# EAGLE board aleph-primary121120 (EAGLE 5.11), part 1 of 2
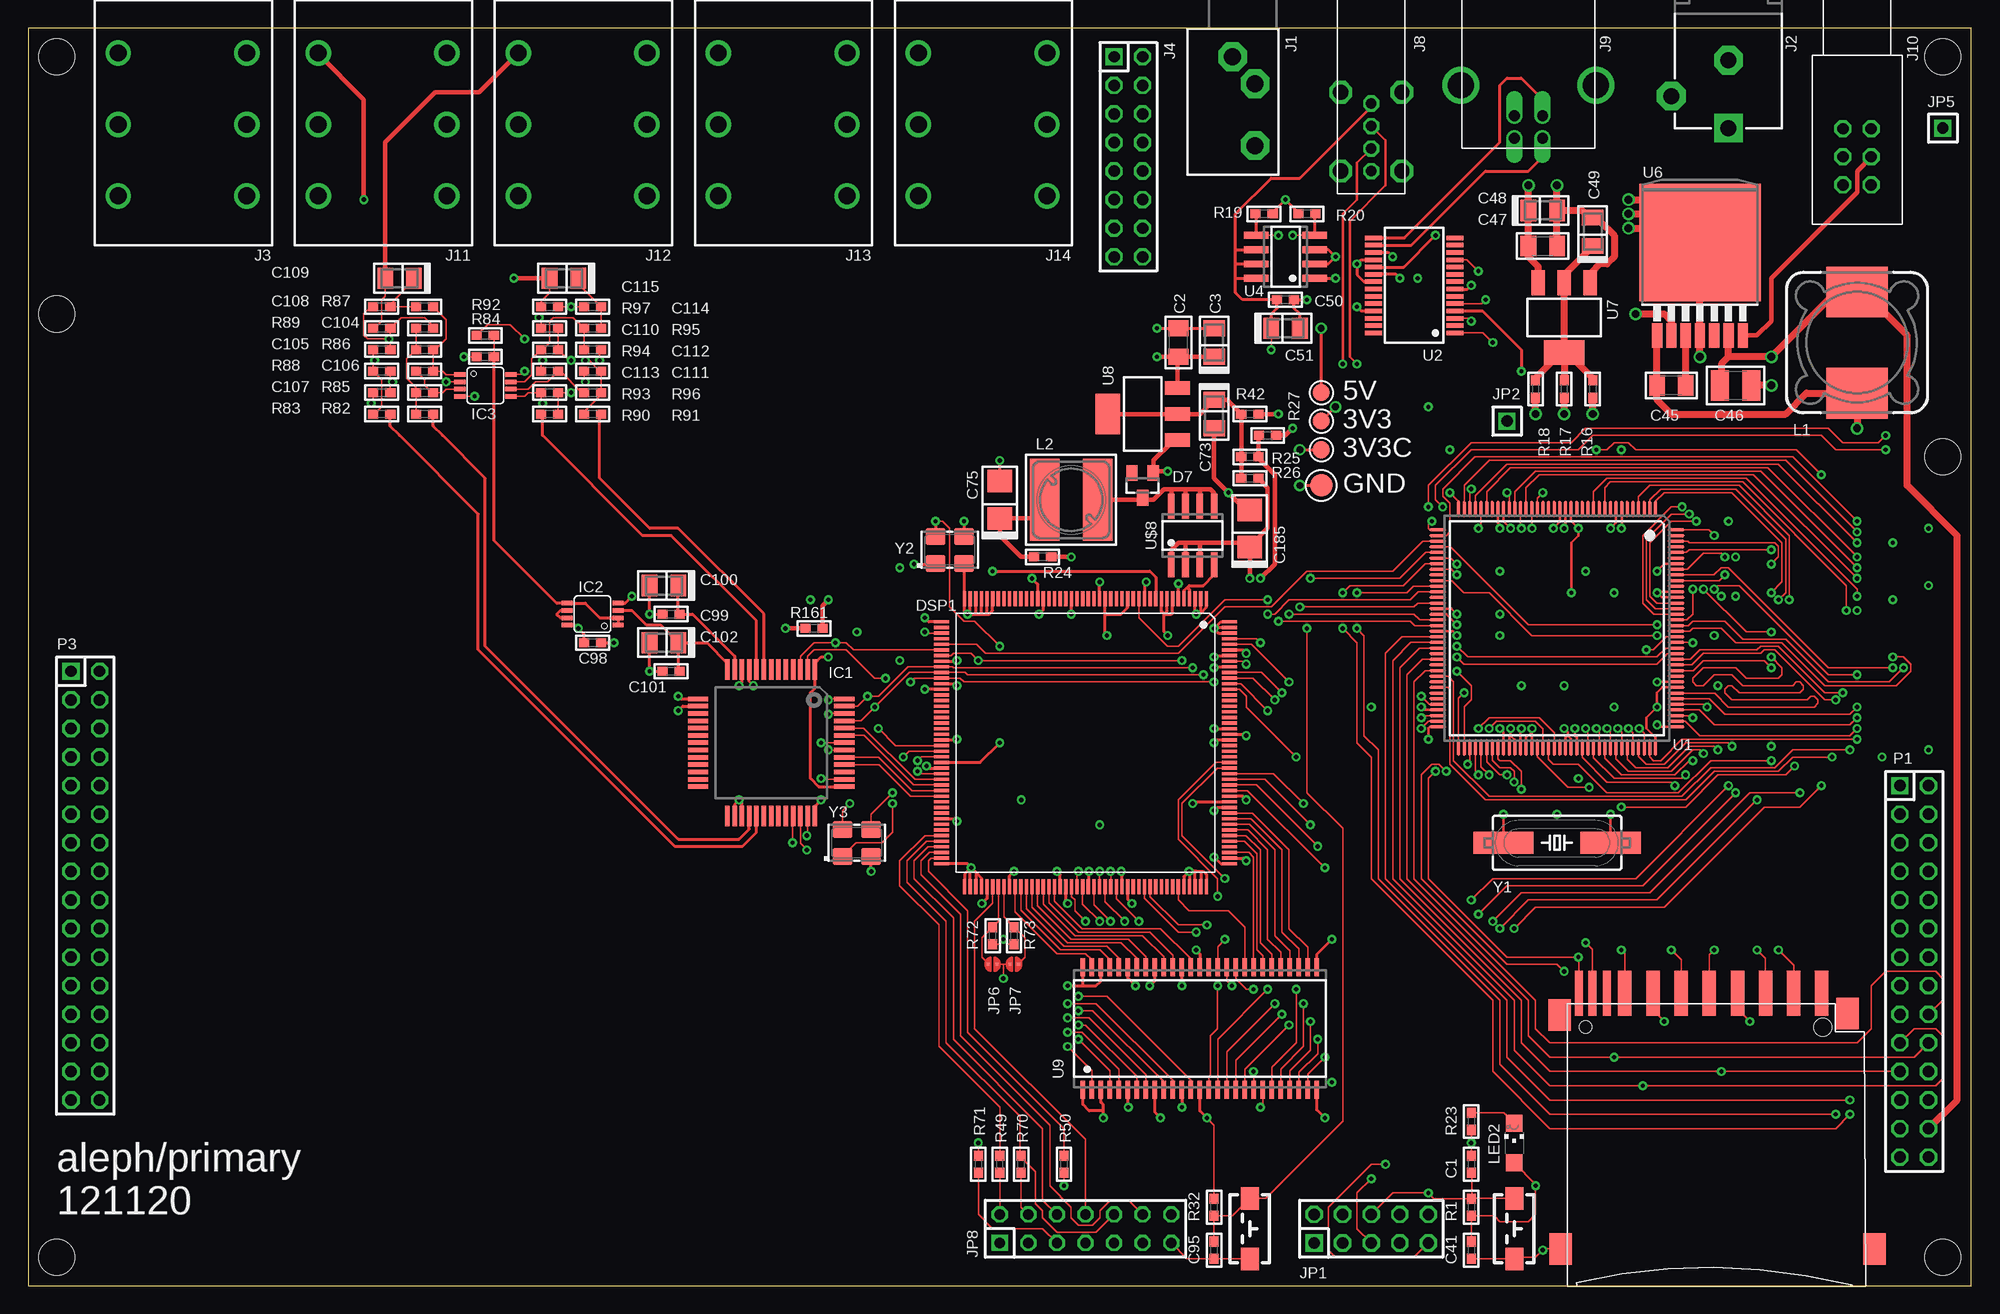
[diagram p0: board, top side]
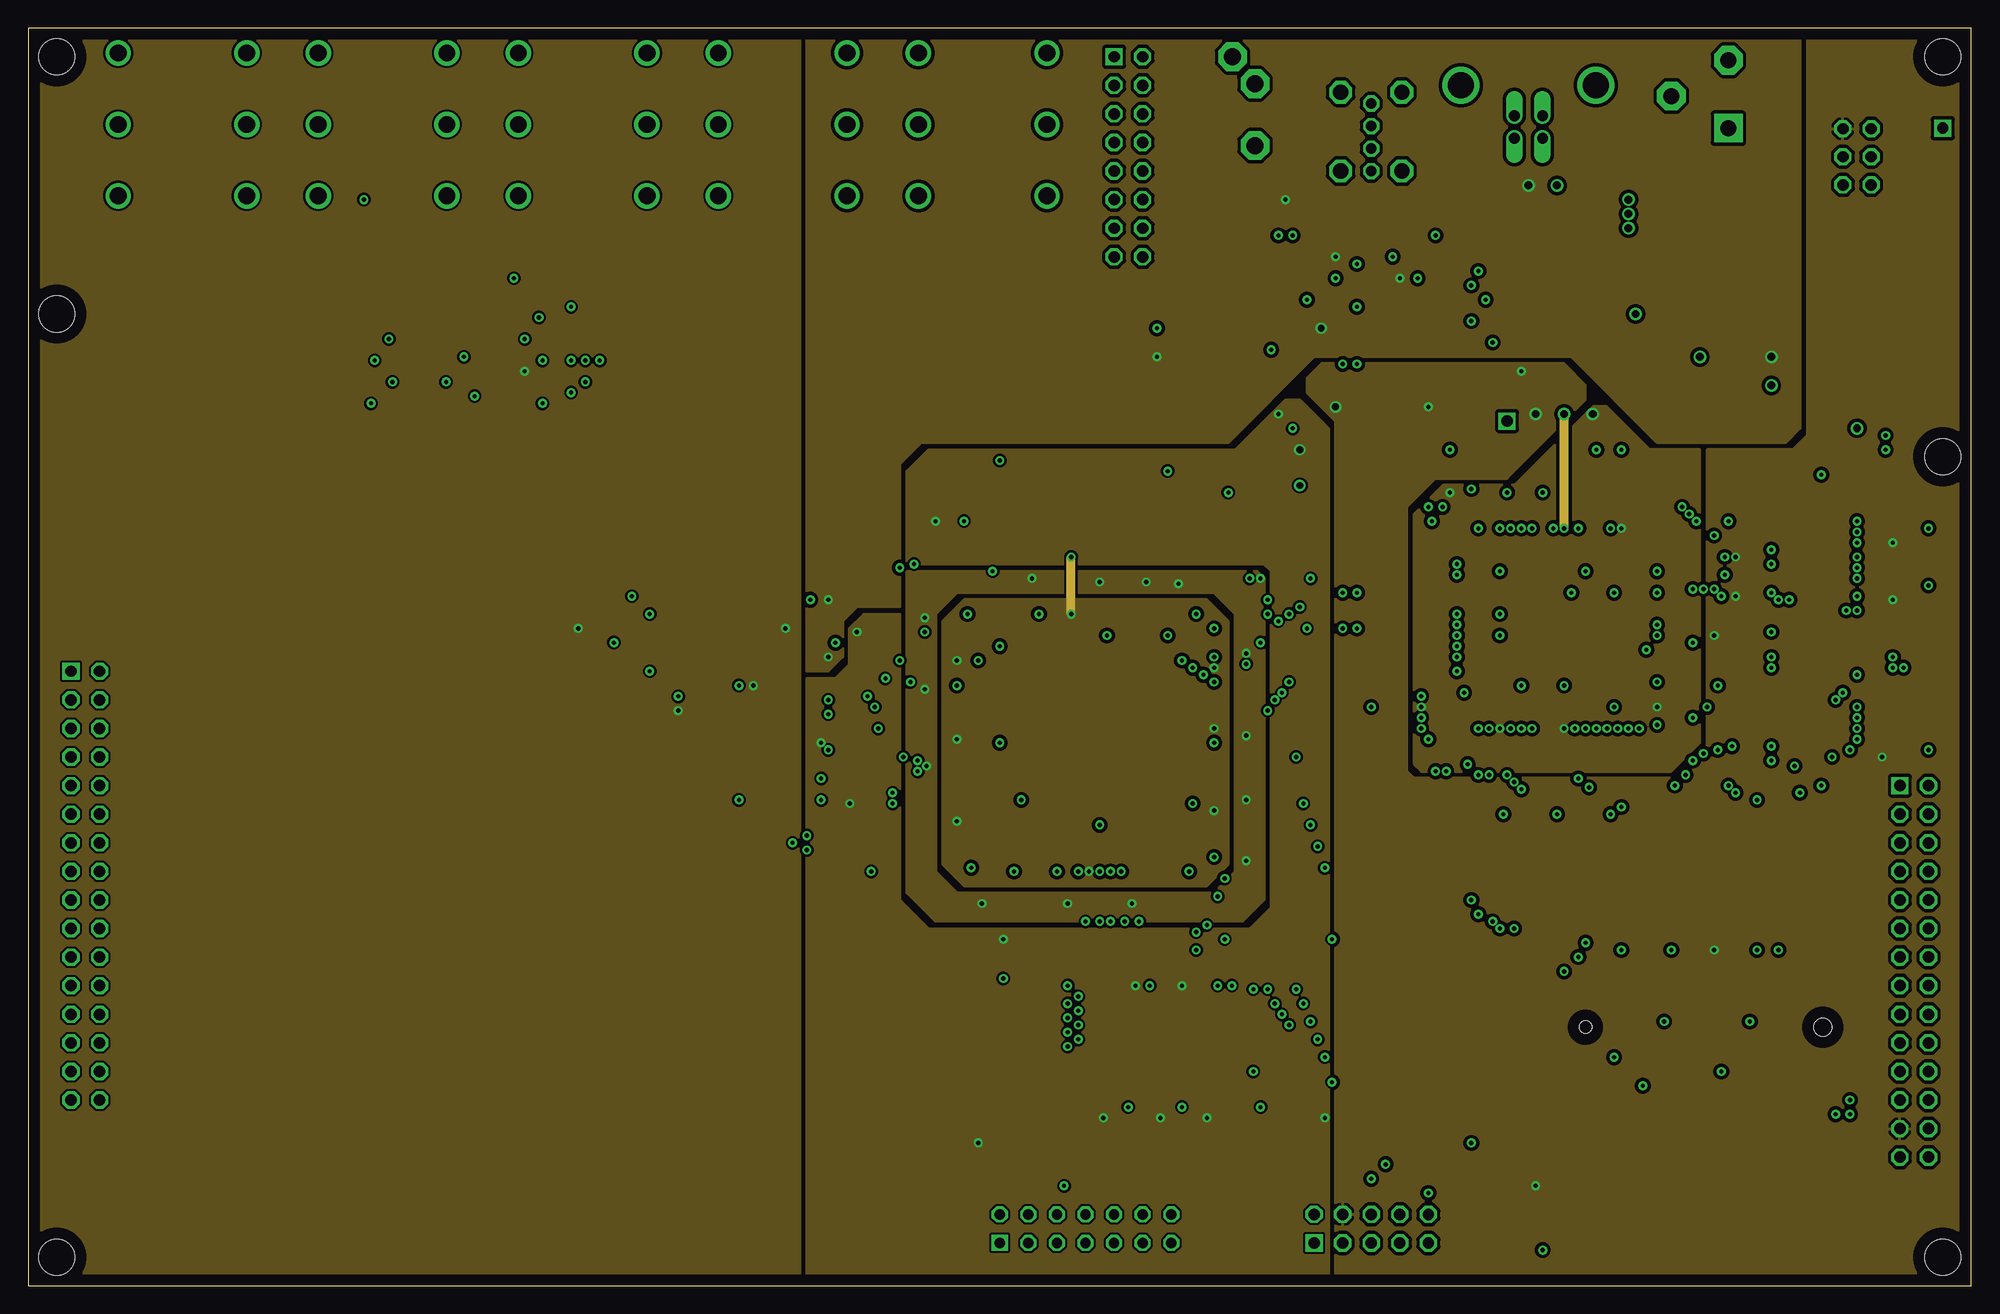
[diagram p1: board, inner layer Route2]
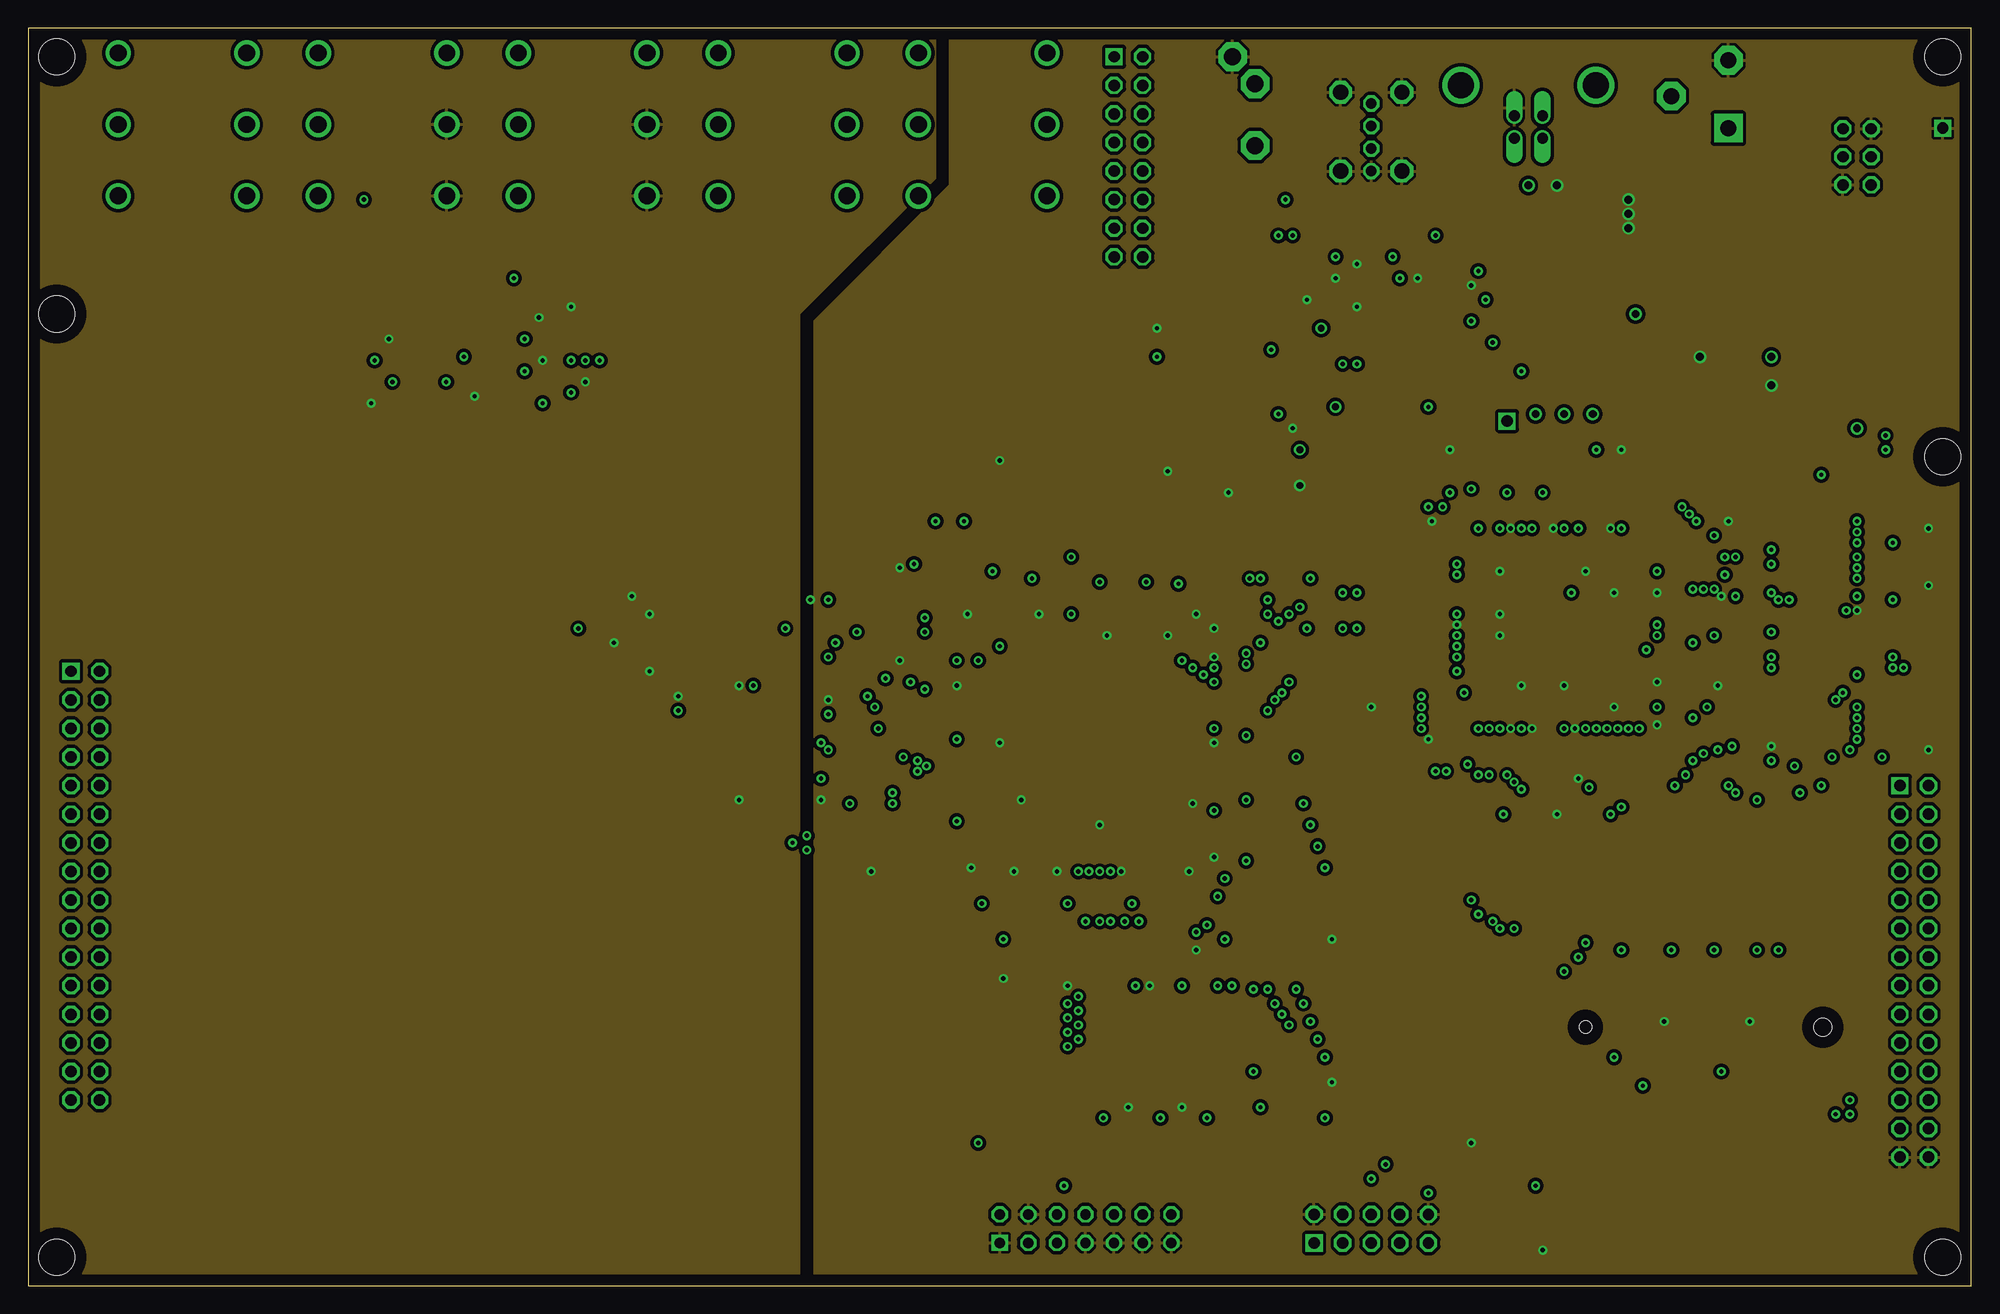
[diagram p2: board, inner layer Route3]
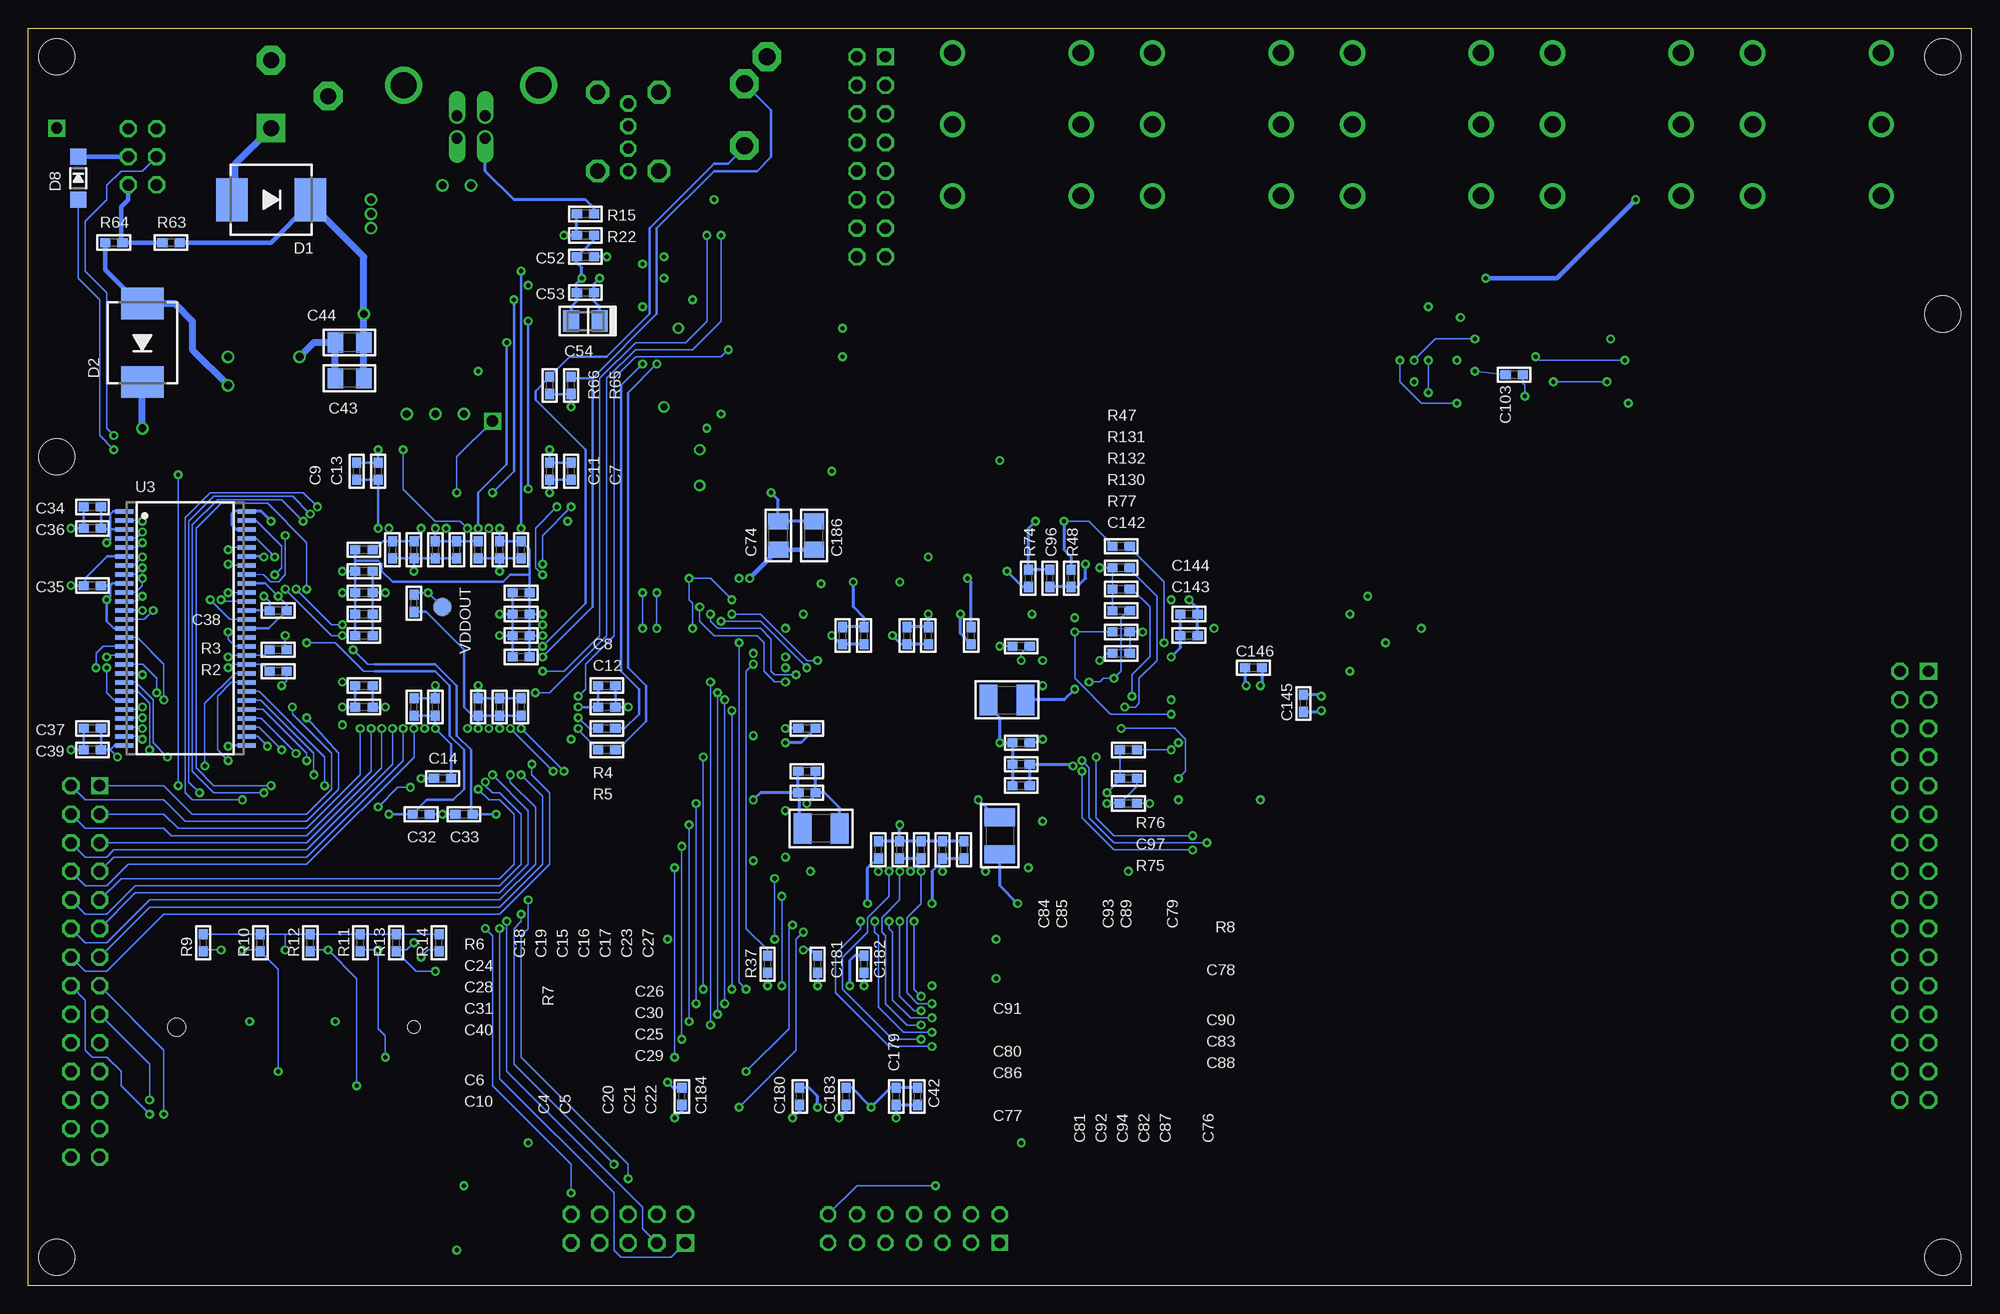
[diagram p3: board, bottom side, seen from below]

Size 172.72 x 111.76 mm. Coordinates in mm from the lower left corner, seen from the top.
Outline: 0,0 172.72,0 172.72,111.76 0,111.76 0,0
Copper layers (1*2+3*16): Top 0.035mm / dielectric 1.5mm / Route2 0.035mm / dielectric 0.15mm / Route3 0.035mm / dielectric 0.2mm / Bottom 0.035mm
Design rules "default *": minimum track width 10mil, minimum drill 24mil, track to track 8mil, track to pad 8mil, pad to pad 8mil, via to via 8mil, smd to smd 8mil, copper to edge 40mil, drill to drill 8mil, minimum pad ring 10mil, minimum via ring 8mil, stop-mask expansion 4mil, vias tented up to drill 0mil, thermal gap 10mil
Holes 3.2 mm at 170.18,109.22 2.54,109.22 2.54,2.54 170.18,2.54 2.54,86.36 170.18,73.66

## Footprints (pad centres in the part's own frame; a part is rotated, then mirrored left to right if it is on the bottom)
SMD-15R = smd 1.5 x 1.5: TP 0,0
C0603 = smd 0.9 x 0.8: 1 -0.762,0; 2 0.762,0
C1206 = smd 1.4 x 1.8: 1 -1.27,0; 2 1.27,0
C1206/T = smd 1.4 x 1.9: + 1.27,0; - -1.27,0
C3225 = smd 1.6 x 2.7: 1 -1.397,0; 2 1.397,0
C3528/T = smd 2 x 2.2: + 1.651,0; - -1.651,0
C1210 = smd 1.6 x 2.7: 1 -1.651,0; 2 1.651,0
SMC = smd 2.8 x 3.8: A 3.493,0; C -3.493,0
SOT23 = smd 1 x 1.4: 1 -0.95,-1.1; 2 0.95,-1.1; 3 0,1.1
SOD123 = smd 1.4 x 1.4: A 1.905,0; C -1.905,0
LQFP176 = smd 1.35 x 0.29: P$1 -12.8,10.75; P$2 -12.8,10.25; P$3 -12.8,9.75; P$4 -12.8,9.25; P$5 -12.8,8.75; P$6 -12.8,8.25; P$7 -12.8,7.75; P$8 -12.8,7.25; P$9 -12.8,6.75; P$10 -12.8,6.25; P$11 -12.8,5.75; P$12 -12.8,5.25; P$13 -12.8,4.75; P$14 -12.8,4.25; P$15 -12.8,3.75; P$16 -12.8,3.25; P$17 -12.8,2.75; P$18 -12.8,2.25; P$19 -12.8,1.75; P$20 -12.8,1.25; P$21 -12.8,0.75; P$22 -12.8,0.25; P$23 -12.8,-0.25; P$24 -12.8,-0.75; P$25 -12.8,-1.25; P$26 -12.8,-1.75; P$27 -12.8,-2.25; P$28 -12.8,-2.75; P$29 -12.8,-3.25; P$30 -12.8,-3.75; P$31 -12.8,-4.25; P$32 -12.8,-4.75; P$33 -12.8,-5.25; P$34 -12.8,-5.75; P$35 -12.8,-6.25; P$36 -12.8,-6.75; P$37 -12.8,-7.25; P$38 -12.8,-7.75; P$39 -12.8,-8.25; P$40 -12.8,-8.75; P$41 -12.8,-9.25; P$42 -12.8,-9.75; P$43 -12.8,-10.25; P$44 -12.8,-10.75; P$89 12.8,-10.75; P$90 12.8,-10.25; P$91 12.8,-9.75; P$92 12.8,-9.25; P$93 12.8,-8.75; P$94 12.8,-8.25; P$95 12.8,-7.75; P$96 12.8,-7.25; P$97 12.8,-6.75; P$98 12.8,-6.25; P$99 12.8,-5.75; P$100 12.8,-5.25; P$101 12.8,-4.75; P$102 12.8,-4.25; P$103 12.8,-3.75; P$104 12.8,-3.25; P$105 12.8,-2.75; P$106 12.8,-2.25; P$107 12.8,-1.75; P$108 12.8,-1.25; P$109 12.8,-0.75; P$110 12.8,-0.25; P$111 12.8,0.25; P$112 12.8,0.75; P$113 12.8,1.25; P$114 12.8,1.75; P$115 12.8,2.25; P$116 12.8,2.75; P$117 12.8,3.25; P$118 12.8,3.75; P$119 12.8,4.25; P$120 12.8,4.75; P$121 12.8,5.25; P$122 12.8,5.75; P$123 12.8,6.25; P$124 12.8,6.75; P$125 12.8,7.25; P$126 12.8,7.75; P$127 12.8,8.25; P$128 12.8,8.75; P$129 12.8,9.25; P$130 12.8,9.75; P$131 12.8,10.25; P$132 12.8,10.75 | smd 0.29 x 1.35: P$45 -10.75,-12.8; P$46 -10.25,-12.8; P$47 -9.75,-12.8; P$48 -9.25,-12.8; P$49 -8.75,-12.8; P$50 -8.25,-12.8; P$51 -7.75,-12.8; P$52 -7.25,-12.8; P$53 -6.75,-12.8; P$54 -6.25,-12.8; P$55 -5.75,-12.8; P$56 -5.25,-12.8; P$57 -4.75,-12.8; P$58 -4.25,-12.8; P$59 -3.75,-12.8; P$60 -3.25,-12.8; P$61 -2.75,-12.8; P$62 -2.25,-12.8; P$63 -1.75,-12.8; P$64 -1.25,-12.8; P$65 -0.75,-12.8; P$66 -0.25,-12.8; P$67 0.25,-12.8; P$68 0.75,-12.8; P$69 1.25,-12.8; P$70 1.75,-12.8; P$71 2.25,-12.8; P$72 2.75,-12.8; P$73 3.25,-12.8; P$74 3.75,-12.8; P$75 4.25,-12.8; P$76 4.75,-12.8; P$77 5.25,-12.8; P$78 5.75,-12.8; P$79 6.25,-12.8; P$80 6.75,-12.8; P$81 7.25,-12.8; P$82 7.75,-12.8; P$83 8.25,-12.8; P$84 8.75,-12.8; P$85 9.25,-12.8; P$86 9.75,-12.8; P$87 10.25,-12.8; P$88 10.75,-12.8; P$133 10.75,12.8; P$134 10.25,12.8; P$135 9.75,12.8; P$136 9.25,12.8; P$137 8.75,12.8; P$138 8.25,12.8; P$139 7.75,12.8; P$140 7.25,12.8; P$141 6.75,12.8; P$142 6.25,12.8; P$143 5.75,12.8; P$144 5.25,12.8; P$145 4.75,12.8; P$146 4.25,12.8; P$147 3.75,12.8; P$148 3.25,12.8; P$149 2.75,12.8; P$150 2.25,12.8; P$151 1.75,12.8; P$152 1.25,12.8; P$153 0.75,12.8; P$154 0.25,12.8; P$155 -0.25,12.8; P$156 -0.75,12.8; P$157 -1.25,12.8; P$158 -1.75,12.8; P$159 -2.25,12.8; P$160 -2.75,12.8; P$161 -3.25,12.8; P$162 -3.75,12.8; P$163 -4.25,12.8; P$164 -4.75,12.8; P$165 -5.25,12.8; P$166 -5.75,12.8; P$167 -6.25,12.8; P$168 -6.75,12.8; P$169 -7.25,12.8; P$170 -7.75,12.8; P$171 -8.25,12.8; P$172 -8.75,12.8; P$173 -9.25,12.8; P$174 -9.75,12.8; P$175 -10.25,12.8; P$176 -10.75,12.8
SMD-20R = smd 2 x 2: TP 0,0
PQFP52 = smd 1.8 x 0.4: 1 -6.5,3.9; 2 -6.5,3.25; 3 -6.5,2.6; 4 -6.5,1.95; 5 -6.5,1.3; 6 -6.5,0.65; 7 -6.5,0; 8 -6.5,-0.65; 9 -6.5,-1.3; 10 -6.5,-1.95; 11 -6.5,-2.6; 12 -6.5,-3.25; 13 -6.5,-3.9; 27 6.5,-3.9; 28 6.5,-3.25; 29 6.5,-2.6; 30 6.5,-1.95; 31 6.5,-1.3; 32 6.5,-0.65; 33 6.5,0; 34 6.5,0.65; 35 6.5,1.3; 36 6.5,1.95; 37 6.5,2.6; 38 6.5,3.25; 39 6.5,3.9 | smd 0.4 x 1.8: 14 -3.9,-6.5; 15 -3.25,-6.5; 16 -2.6,-6.5; 17 -1.95,-6.5; 18 -1.3,-6.5; 19 -0.65,-6.5; 20 0,-6.5; 21 0.65,-6.5; 22 1.3,-6.5; 23 1.95,-6.5; 24 2.6,-6.5; 25 3.25,-6.5; 26 3.9,-6.5; 40 3.9,6.5; 41 3.25,6.5; 42 2.6,6.5; 43 1.95,6.5; 44 1.3,6.5; 45 0.65,6.5; 46 0,6.5; 47 -0.65,6.5; 48 -1.3,6.5; 49 -1.95,6.5; 50 -2.6,6.5; 51 -3.25,6.5; 52 -3.9,6.5
MSOP08 = smd 0.4 x 1: 1 -0.976,-2.263; 2 -0.326,-2.263; 3 0.324,-2.263; 4 0.974,-2.263; 5 0.974,2.262; 6 0.324,2.262; 7 -0.326,2.262; 8 -0.976,2.262
SJ1-3533NG = drill 1.5 pad 2.54 octagon: 1 0,-0.9; 2 2.4,1.1; 3 7.9,1.1
PJ-102XH = drill 1.422 pad 2.54 square: 1 0,0 | drill 1.422 pad 2.54 octagon: 2 0,-6.032; 3 5.08,-2.857
NEUTRIK-NRJ6HM-1 = drill 1.5 round: R 7.23,11.1; RN -4.2,11.1; S 7.23,4.75; SN -4.2,4.75; T 7.23,17.45; TN -4.2,17.45
DIL-100-2X08 = drill 1.016 square: 1 -8.89,-1.27 | drill 1.016 octagon: 2 -8.89,1.27; 3 -6.35,-1.27; 4 -6.35,1.27; 5 -3.81,-1.27; 6 -3.81,1.27; 7 -1.27,-1.27; 8 -1.27,1.27; 9 1.27,-1.27; 10 1.27,1.27; 11 3.81,-1.27; 12 3.81,1.27; 13 6.35,-1.27; 14 6.35,1.27; 15 8.89,-1.27; 16 8.89,1.27
USBA-VERT = drill 0.92 octagon: 1 0,-6; 2 0,-4; 3 0,-2; 4 0,0 | drill 1.35 octagon: G1 -2.72,0; G2 -2.72,-7; G3 2.72,-7; G4 2.72,0
USB_B = drill 0.95 offset: DM -1.25,4.71; DP -1.25,2.71; GND 1.25,2.71; VCC 1.25,4.71 | drill 2.3 round: MOUNT1 -6,0; MOUNT2 6,0
PHA2U = drill 1 octagon: 0 -1.25,0; 1 -1.25,-2.5; 2 -1.25,2.5; _0 1.25,0; _1 1.25,-2.5; _2 1.25,2.5
AVR-JTAG-10 = drill 1.016 square: 1 -5.08,-1.27 | drill 1.016 octagon: 2 -5.08,1.27; 3 -2.54,-1.27; 4 -2.54,1.27; 5 0,-1.27; 6 0,1.27; 7 2.54,-1.27; 8 2.54,1.27; 9 5.08,-1.27; 10 5.08,1.27
1X01 = drill 1.016 square: 1 0,0
SJ-35 = smd 0.254 x 0.254: 1 -0.381,0; 2 0.381,0
JPQ-07 = drill 0.914 square: 1 -7.62,-1.27 | drill 0.914 octagon: 2 -7.62,1.27; 3 -5.08,-1.27; 4 -5.08,1.27; 5 -2.54,-1.27; 6 -2.54,1.27; 7 0,-1.27; 8 0,1.27; 9 2.54,-1.27; 10 2.54,1.27; 11 5.08,-1.27; 12 5.08,1.27; 13 7.62,-1.27; 14 7.62,1.27
MSS1278 = smd 5.5 x 4.5: 1 0,4.5; 2 0,-4.5
SRR6038 = smd 7.3 x 2.6: 1 0,2.35; 2 0,-2.35
CHIPLED_1206 = smd 1.5 x 1.5: A 0,-1.75; C 0,1.75
DIL-100-2X14 = drill 1.016 square: 1 -16.51,-1.27 | drill 1.016 octagon: 2 -16.51,1.27; 3 -13.97,-1.27; 4 -13.97,1.27; 5 -11.43,-1.27; 6 -11.43,1.27; 7 -8.89,-1.27; 8 -8.89,1.27; 9 -6.35,-1.27; 10 -6.35,1.27; 11 -3.81,-1.27; 12 -3.81,1.27; 13 -1.27,-1.27; 14 -1.27,1.27; 15 1.27,-1.27; 16 1.27,1.27; 17 3.81,-1.27; 18 3.81,1.27; 19 6.35,-1.27; 20 6.35,1.27; 21 8.89,-1.27; 22 8.89,1.27; 23 11.43,-1.27; 24 11.43,1.27; 25 13.97,-1.27; 26 13.97,1.27; 27 16.51,-1.27; 28 16.51,1.27
DIL-100-2X16 = drill 1.016 square: 1 -19.05,-1.27 | drill 1.016 octagon: 2 -19.05,1.27; 3 -16.51,-1.27; 4 -16.51,1.27; 5 -13.97,-1.27; 6 -13.97,1.27; 7 -11.43,-1.27; 8 -11.43,1.27; 9 -8.89,-1.27; 10 -8.89,1.27; 11 -6.35,-1.27; 12 -6.35,1.27; 13 -3.81,-1.27; 14 -3.81,1.27; 15 -1.27,-1.27; 16 -1.27,1.27; 17 1.27,-1.27; 18 1.27,1.27; 19 3.81,-1.27; 20 3.81,1.27; 21 6.35,-1.27; 22 6.35,1.27; 23 8.89,-1.27; 24 8.89,1.27; 25 11.43,-1.27; 26 11.43,1.27; 27 13.97,-1.27; 28 13.97,1.27; 29 16.51,-1.27; 30 16.51,1.27; 31 19.05,-1.27; 32 19.05,1.27
R0603 = smd 0.9 x 0.8: 1 -0.762,0; 2 0.762,0
LQFP144 = smd 0.25 x 1.5: 1 -8.75,-10.6; 2 -8.25,-10.6; 3 -7.75,-10.6; 4 -7.25,-10.6; 5 -6.75,-10.6; 6 -6.25,-10.6; 7 -5.75,-10.6; 8 -5.25,-10.6; 9 -4.75,-10.6; 10 -4.25,-10.6; 11 -3.75,-10.6; 12 -3.25,-10.6; 13 -2.75,-10.6; 14 -2.25,-10.6; 15 -1.75,-10.6; 16 -1.25,-10.6; 17 -0.75,-10.6; 18 -0.25,-10.6; 19 0.25,-10.6; 20 0.75,-10.6; 21 1.25,-10.6; 22 1.75,-10.6; 23 2.25,-10.6; 24 2.75,-10.6; 25 3.25,-10.6; 26 3.75,-10.6; 27 4.25,-10.6; 28 4.75,-10.6; 29 5.25,-10.6; 30 5.75,-10.6; 31 6.25,-10.6; 32 6.75,-10.6; 33 7.25,-10.6; 34 7.75,-10.6; 35 8.25,-10.6; 36 8.75,-10.6; 73 8.75,10.6; 74 8.25,10.6; 75 7.75,10.6; 76 7.25,10.6; 77 6.75,10.6; 78 6.25,10.6; 79 5.75,10.6; 80 5.25,10.6; 81 4.75,10.6; 82 4.25,10.6; 83 3.75,10.6; 84 3.25,10.6; 85 2.75,10.6; 86 2.25,10.6; 87 1.75,10.6; 88 1.25,10.6; 89 0.75,10.6; 90 0.25,10.6; 91 -0.25,10.6; 92 -0.75,10.6; 93 -1.25,10.6; 94 -1.75,10.6; 95 -2.25,10.6; 96 -2.75,10.6; 97 -3.25,10.6; 98 -3.75,10.6; 99 -4.25,10.6; 100 -4.75,10.6; 101 -5.25,10.6; 102 -5.75,10.6; 103 -6.25,10.6; 104 -6.75,10.6; 105 -7.25,10.6; 106 -7.75,10.6; 107 -8.25,10.6; 108 -8.75,10.6 | smd 1.5 x 0.25: 37 10.6,-8.75; 38 10.6,-8.25; 39 10.6,-7.75; 40 10.6,-7.25; 41 10.6,-6.75; 42 10.6,-6.25; 43 10.6,-5.75; 44 10.6,-5.25; 45 10.6,-4.75; 46 10.6,-4.25; 47 10.6,-3.75; 48 10.6,-3.25; 49 10.6,-2.75; 50 10.6,-2.25; 51 10.6,-1.75; 52 10.6,-1.25; 53 10.6,-0.75; 54 10.6,-0.25; 55 10.6,0.25; 56 10.6,0.75; 57 10.6,1.25; 58 10.6,1.75; 59 10.6,2.25; 60 10.6,2.75; 61 10.6,3.25; 62 10.6,3.75; 63 10.6,4.25; 64 10.6,4.75; 65 10.6,5.25; 66 10.6,5.75; 67 10.6,6.25; 68 10.6,6.75; 69 10.6,7.25; 70 10.6,7.75; 71 10.6,8.25; 72 10.6,8.75; 109 -10.6,8.75; 110 -10.6,8.25; 111 -10.6,7.75; 112 -10.6,7.25; 113 -10.6,6.75; 114 -10.6,6.25; 115 -10.6,5.75; 116 -10.6,5.25; 117 -10.6,4.75; 118 -10.6,4.25; 119 -10.6,3.75; 120 -10.6,3.25; 121 -10.6,2.75; 122 -10.6,2.25; 123 -10.6,1.75; 124 -10.6,1.25; 125 -10.6,0.75; 126 -10.6,0.25; 127 -10.6,-0.25; 128 -10.6,-0.75; 129 -10.6,-1.25; 130 -10.6,-1.75; 131 -10.6,-2.25; 132 -10.6,-2.75; 133 -10.6,-3.25; 134 -10.6,-3.75; 135 -10.6,-4.25; 136 -10.6,-4.75; 137 -10.6,-5.25; 138 -10.6,-5.75; 139 -10.6,-6.25; 140 -10.6,-6.75; 141 -10.6,-7.25; 142 -10.6,-7.75; 143 -10.6,-8.25; 144 -10.6,-8.75
SSOP28 = smd 0.4 x 1.5: 1 -4.225,-3.625; 2 -3.575,-3.625; 3 -2.925,-3.625; 4 -2.275,-3.625; 5 -1.625,-3.625; 6 -0.975,-3.625; 7 -0.325,-3.625; 8 0.325,-3.625; 9 0.975,-3.625; 10 1.625,-3.625; 11 2.275,-3.625; 12 2.925,-3.625; 13 3.575,-3.625; 14 4.225,-3.625; 15 4.225,3.625; 16 3.575,3.625; 17 2.925,3.625; 18 2.275,3.625; 19 1.625,3.625; 20 0.975,3.625; 21 0.325,3.625; 22 -0.325,3.625; 23 -0.975,3.625; 24 -1.625,3.625; 25 -2.275,3.625; 26 -2.925,3.625; 27 -3.575,3.625; 28 -4.225,3.625
TSOP54 = smd 0.4 x 1.6: 1 -10.4,-5.45; 2 -9.6,-5.45; 3 -8.8,-5.45; 4 -8,-5.45; 5 -7.2,-5.45; 6 -6.4,-5.45; 7 -5.6,-5.45; 8 -4.8,-5.45; 9 -4,-5.45; 10 -3.2,-5.45; 11 -2.4,-5.45; 12 -1.6,-5.45; 13 -0.8,-5.45; 14 0,-5.45; 15 0.8,-5.45; 16 1.6,-5.45; 17 2.4,-5.45; 18 3.2,-5.45; 19 4,-5.45; 20 4.8,-5.45; 21 5.6,-5.45; 22 6.4,-5.45; 23 7.2,-5.45; 24 8,-5.45; 25 8.8,-5.45; 26 9.6,-5.45; 27 10.4,-5.45; 28 10.4,5.45; 29 9.6,5.45; 30 8.8,5.45; 31 8,5.45; 32 7.2,5.45; 33 6.4,5.45; 34 5.6,5.45; 35 4.8,5.45; 36 4,5.45; 37 3.2,5.45; 38 2.4,5.45; 39 1.6,5.45; 40 0.8,5.45; 41 0,5.45; 42 -0.8,5.45; 43 -1.6,5.45; 44 -2.4,5.45; 45 -3.2,5.45; 46 -4,5.45; 47 -4.8,5.45; 48 -5.6,5.45; 49 -6.4,5.45; 50 -7.2,5.45; 51 -8,5.45; 52 -8.8,5.45; 53 -9.6,5.45; 54 -10.4,5.45
SO08 = smd 0.6 x 2.2: 1 -1.905,-2.6; 2 -0.635,-2.6; 3 0.635,-2.6; 4 1.905,-2.6; 5 1.905,2.6; 6 0.635,2.6; 7 -0.635,2.6; 8 -1.905,2.6
TO263-7 = smd 0.914 x 2.159: 1 -3.81,-5.715; 2 -2.54,-5.715; 3 -1.27,-5.715; 4 0,-5.715; 5 1.27,-5.715; 6 2.54,-5.715; 7 3.81,-5.715 | smd 10.8 x 10.41: 8 0,2.54
SOT223 = smd 1.219 x 2.235: 1 -2.311,-3.099; 2 0,-3.099; 3 2.311,-3.099 | smd 3.6 x 2.2: 4 0,3.099
PANASONIC-EVQ = smd 2 x 1.6: 1 2.7,0; 2 -2.7,0
06132 = smd 1.2 x 4: 1 6.9,0.9; 2 4.4,0.9; 3 1.9,0.9; 4 -0.6,0.9; 5 -3.1,0.9; 6 -5.6,0.9; 7 -8.1,0.9; 9 9.4,0.9 | smd 0.7 x 4: 8 -9.7,0.9; CD -11,0.9; WP -12.2,0.9 | smd 2 x 2.8: GP -13.8,-21.8; GP2 14.1,-21.8; GP3 11.7,-0.9; GP4 -13.9,-1 | hole 1.1: -11.6,-2.1 | hole 1.6: 9.5,-2.1
SMD-15RN = smd 1.5 x 1.5: TP 0,0
HC49UP = smd 5.334 x 1.93: 1 -4.763,0; 2 4.763,0
ASFL1 = smd 1.7 x 1.5: 1 -1.27,-1.2; 2 1.27,-1.2; 3 1.27,1.2; 4 -1.27,1.2

## Placement (x,y rotation side)
3V3  TPS-SMD-15R  [SMD-15R]  114.94,76.83 0 top
3V3C  TPS-SMD-15R  [SMD-15R]  114.94,74.3 0 top
5V  TPS-SMD-15R  [SMD-15R]  114.94,79.38 0 top
C1  100n  [C0603]  128.27,10.79 90 top
C2  100n  [C1206]  102.23,83.82 270 top
C3  10u  [C1206/T]  105.41,83.82 270 top
C4  100n  [C0603]  138.43,51.44 90 bottom
C5  33n  [C0603]  136.53,51.44 90 bottom
C6  100n  [C0603]  142.88,53.34 0 bottom
C7  100n  [C0603]  124.46,72.39 90 bottom
C8  100n  [C0603]  121.28,53.34 0 bottom
C9  100n  [C0603]  143.51,72.39 90 bottom
C10  33n  [C0603]  142.88,51.44 0 bottom
C11  33n  [C0603]  126.36,72.39 90 bottom
C12  33n  [C0603]  121.28,51.44 0 bottom
C13  33n  [C0603]  141.6,72.39 90 bottom
C14  4.7u  [C0603]  135.89,45.09 180 bottom
C15  33n  [C0603]  136.53,65.41 270 bottom
C16  100n  [C0603]  134.62,65.41 270 bottom
C17  4.7u  [C0603]  132.72,65.41 270 bottom
C18  2.2u  [C0603]  140.34,65.41 270 bottom
C19  470p  [C0603]  138.43,65.41 270 bottom
C20  2.7n  [C0603]  132.72,51.44 90 bottom
C21  33n  [C0603]  130.81,51.44 90 bottom
C22  2.2u  [C0603]  128.91,51.44 90 bottom
C23  2.7n  [C0603]  130.81,65.41 270 bottom
C24  2.7n  [C0603]  142.88,63.5 0 bottom
C25  2.7n  [C0603]  128.91,57.78 180 bottom
C26  2.7n  [C0603]  128.91,61.59 180 bottom
C27  33n  [C0603]  128.91,65.41 270 bottom
C28  33n  [C0603]  142.88,61.59 0 bottom
C29  33n  [C0603]  128.91,55.88 180 bottom
C30  33n  [C0603]  128.91,59.69 180 bottom
C31  100n  [C0603]  142.88,59.69 0 bottom
C32  22p  [C0603]  137.79,41.91 0 bottom
C33  22p  [C0603]  133.99,41.91 180 bottom
C34  4.7u  [C0603]  167,69.22 180 bottom
C35  100n  [C0603]  167,62.23 180 bottom
C36  33n  [C0603]  167,67.31 180 bottom
C37  100n  [C0603]  167,49.53 180 bottom
C38  33n  [C0603]  150.5,60.01 0 bottom
C39  4.7u  [C0603]  167,47.62 180 bottom
C40  2.2u  [C0603]  142.88,57.78 0 bottom
C41  100n  [C0603]  128.27,3.17 270 top
C42  10n  [C0603]  93.66,16.83 270 bottom
C43  22u  [C1206]  144.15,80.64 0 bottom
C44  470n  [C1206]  144.15,83.82 0 bottom
C45  10n  [C1206]  146.05,80.01 0 top
C46  47u  [C3225]  151.76,80.01 0 top
C47  100n  [C1206]  134.62,92.39 180 top
C48  10u  [C1206/T]  134.62,95.57 180 top
C49  10u  [C1206/T]  139.06,93.66 270 top
C50  100n  [C0603]  111.76,87.63 180 top
C51  4.7u  [C1206/T]  111.76,85.09 180 top
C52  100n  [C0603]  123.19,91.44 0 bottom
C53  100n  [C0603]  123.19,88.27 0 bottom
C54  4.7u  [C1206/T]  123.19,85.72 0 bottom
C73  10u  [C1206/T]  105.41,77.47 90 top
C74  100n  [C1206]  106.05,66.67 270 bottom
C75  100u  [C3528/T]  86.36,69.85 270 top
C76  10u  [C1210]  86.36,40.01 270 bottom
C77  10u  [C1210]  102.23,40.64 180 bottom
C78  10u  [C1210]  85.72,52.07 0 bottom
C79  100n  [C0603]  88.9,57.78 90 bottom
C80  100n  [C0603]  103.5,45.72 180 bottom
C81  100n  [C0603]  97.16,38.73 270 bottom
C82  100n  [C0603]  91.44,38.73 270 bottom
C83  100n  [C0603]  84.45,46.35 0 bottom
C84  100n  [C0603]  100.33,57.78 90 bottom
C85  10n  [C0603]  98.42,57.78 90 bottom
C86  10n  [C0603]  103.5,43.81 180 bottom
C87  10n  [C0603]  89.53,38.73 270 bottom
C88  10n  [C0603]  84.45,44.45 0 bottom
C89  100n  [C0603]  92.71,57.78 90 bottom
C90  100n  [C0603]  84.45,48.26 0 bottom
C91  100n  [C0603]  103.5,49.53 180 bottom
C92  100n  [C0603]  95.25,38.73 270 bottom
C93  10n  [C0603]  94.61,57.78 90 bottom
C94  10n  [C0603]  93.34,38.73 270 bottom
C95  100n  [C0603]  105.41,3.17 270 top
C96  100n  [C0603]  81.92,62.87 90 bottom
C97  100n  [C0603]  74.93,45.09 180 bottom
C98  100n  [C0603]  50.16,57.15 0 top
C99  100n  [C0603]  57.15,59.69 0 top
C100  10u  [C1206/T]  56.52,62.23 0 top
C101  100n  [C0603]  57.15,54.61 0 top
C102  10u  [C1206/T]  56.52,57.15 0 top
C103  100n  [C0603]  40.64,80.96 180 bottom
C104  330p  [C0603]  35.24,85.09 180 top
C105  330p  [C0603]  31.43,83.19 0 top
C106  100p  [C0603]  35.24,81.28 0 top
C107  220p  [C0603]  31.43,79.38 0 top
C108  2200p  [C0603]  31.43,87 0 top
C109  10u  [C1206/T]  33.02,89.53 0 top
C110  330p  [C0603]  46.35,85.09 0 top
C111  330p  [C0603]  50.16,81.28 180 top
C112  100p  [C0603]  50.16,83.19 180 top
C113  220p  [C0603]  46.35,81.28 0 top
C114  2200p  [C0603]  50.16,87 0 top
C115  10u  [C1206/T]  47.62,89.53 0 top
C142  10n  [C0603]  75.56,56.2 180 bottom
C143  100n  [C0603]  69.53,57.78 0 bottom
C144  100n  [C0603]  69.53,59.69 0 bottom
C145  100n  [C0603]  59.37,51.75 90 bottom
C146  100n  [C0603]  63.82,54.93 0 bottom
C179  10n  [C0603]  95.57,16.83 270 bottom
C180  10n  [C0603]  104.14,16.83 270 bottom
C181  10n  [C0603]  102.55,28.57 270 bottom
C182  10n  [C0603]  98.42,28.57 270 bottom
C183  10n  [C0603]  100.01,16.83 270 bottom
C184  10n  [C0603]  114.62,16.83 270 bottom
C185  100u  [C3528/T]  108.58,67.31 270 top
C186  10u  [C1206]  102.87,66.67 270 bottom
D1  MBRS360T3  [SMC]  151.13,96.52 180 bottom
D2  MBRS360T3  [SMC]  162.56,83.82 90 bottom
D7  zhcs1000  [SOT23]  99.06,71.12 180 top
D8  1N4148W-7  [SOD123]  168.28,98.42 270 bottom
DSP1  BF533  [LQFP176]  93.98,48.26 270 top
GND  TPS-SMD-20R  [SMD-20R]  114.94,71.12 0 top
IC1  AD1836  [PQFP52]  66.04,48.26 270 top
IC2  AD8606  [MSOP08]  50.16,59.69 90 top
IC3  AD8606  [MSOP08]  40.64,80.01 270 top
J1  SJ1-3533NG  [SJ1-3533NG]  107.95,109.22 270 top
J2  PJ-102AH/BH  [PJ-102XH]  151.13,102.87 180 top
J3  STEREOSW2GND  [NEUTRIK-NRJ6HM-1]  15.24,114.3 180 top
J4  F-2X08-DIL-100  [DIL-100-2X08]  97.79,100.33 270 top
J8  USBA-VERT  [USBA-VERT]  119.38,99.06 180 top
J9  [USB_B]  133.35,106.68 180 top
J10  PHA2U  [PHA2U]  162.56,100.33 180 top
J11  STEREOSW2GND  [NEUTRIK-NRJ6HM-1]  33.02,114.3 180 top
J12  STEREOSW2GND  [NEUTRIK-NRJ6HM-1]  50.8,114.3 180 top
J13  STEREOSW2GND  [NEUTRIK-NRJ6HM-1]  68.58,114.3 180 top
J14  STEREOSW2GND  [NEUTRIK-NRJ6HM-1]  86.36,114.3 180 top
JP1  AVR-JTAG  [AVR-JTAG-10]  119.38,5.08 0 top
JP2  [1X01]  131.44,76.83 0 top
JP5  [1X01]  170.18,102.87 0 top
JP6  [SJ-35]  85.72,28.57 180 top
JP7  [SJ-35]  87.63,28.57 0 top
JP8  JPQ-07-100  [JPQ-07]  93.98,5.08 0 top
L1  MSS1278  [MSS1278]  162.56,83.82 180 top
L2  SRR6038-100Y  [SRR6038]  92.71,69.85 270 top
LED2  [CHIPLED_1206]  132.08,12.7 0 top
P1  M-2X14-DIL-100  [DIL-100-2X14]  167.64,27.94 270 top
P3  M-2X16-DIL-100  [DIL-100-2X16]  5.08,35.56 270 top
R1  10k  [R0603]  128.27,6.99 270 top
R2  4.7k  [R0603]  150.5,54.61 0 bottom
R3  4.7k  [R0603]  150.5,56.52 0 bottom
R4  39  [R0603]  121.28,49.53 0 bottom
R5  39  [R0603]  121.28,47.62 0 bottom
R6  0  [R0603]  142.88,65.41 180 bottom
R7  0  [R0603]  138.43,60.64 270 bottom
R8  100k  [R0603]  84.45,56.83 180 bottom
R9  100k  [R0603]  157.16,30.48 90 bottom
R10  100k  [R0603]  152.08,30.48 90 bottom
R11  100k  [R0603]  143.19,30.48 90 bottom
R12  100k  [R0603]  147.64,30.48 90 bottom
R13  100k  [R0603]  140.02,30.48 90 bottom
R14  100k  [R0603]  136.21,30.48 90 bottom
R15  4.7k  [R0603]  123.19,95.25 0 bottom
R16  0  [R0603]  139.06,79.69 90 top
R17  0  [R0603]  136.53,79.69 90 top
R18  0  [R0603]  133.99,79.69 90 top
R19  47k  [R0603]  109.86,95.25 0 top
R20  47k  [R0603]  113.67,95.25 180 top
R22  10k  [R0603]  123.19,93.34 0 bottom
R23  150  [R0603]  128.27,14.61 90 top
R24  0  [R0603]  90.17,64.77 180 top
R25  0  [R0603]  108.58,73.66 180 top
R26  0  [R0603]  108.58,71.75 180 top
R27  3.32k  [R0603]  110.17,75.56 0 top
R32  10k  [R0603]  105.41,6.99 90 top
R37  22  [R0603]  107,28.57 90 bottom
R42  0  [R0603]  108.58,77.47 180 top
R47  4k7  [R0603]  75.56,65.72 0 bottom
R48  10k  [R0603]  80.01,62.87 90 bottom
R49  0  [R0603]  86.36,10.79 270 top
R50  0  [R0603]  92.08,10.79 270 top
R63  330k  [R0603]  160.02,92.71 0 bottom
R64  100k  [R0603]  165.1,92.71 180 bottom
R65  10k  [R0603]  124.46,80.01 90 bottom
R66  10k  [R0603]  126.36,80.01 90 bottom
R70  4k7  [R0603]  88.27,10.79 270 top
R71  4k7  [R0603]  84.45,10.79 270 top
R72  10k  [R0603]  85.72,31.11 270 top
R73  10k  [R0603]  87.63,31.11 270 top
R74  33  [R0603]  83.82,62.87 90 bottom
R75  10k  [R0603]  74.93,42.86 0 bottom
R76  33  [R0603]  74.93,47.62 180 bottom
R77  10k  [R0603]  75.56,58.1 0 bottom
R82  11k  [R0603]  35.24,77.47 0 top
R83  5k49  [R0603]  31.43,77.47 0 top
R84  2k74  [R0603]  40.64,82.55 0 top
R85  3k32  [R0603]  35.24,79.38 180 top
R86  5k49  [R0603]  35.24,83.19 180 top
R87  604  [R0603]  35.24,87 180 top
R88  1k65  [R0603]  31.43,81.28 0 top
R89  49k9  [R0603]  31.43,85.09 0 top
R90  11k  [R0603]  46.35,77.47 180 top
R91  5k49  [R0603]  50.16,77.47 0 top
R92  2k74  [R0603]  40.64,84.45 0 top
R93  3k32  [R0603]  46.35,79.38 0 top
R94  5k49  [R0603]  46.35,83.19 0 top
R95  604  [R0603]  50.16,85.09 0 top
R96  1k65  [R0603]  50.16,79.38 180 top
R97  49k9  [R0603]  46.35,87 0 top
R130  10k  [R0603]  75.56,60.01 0 bottom
R131  10k  [R0603]  75.56,63.82 0 bottom
R132  10k  [R0603]  75.56,61.91 0 bottom
R161  0  [R0603]  69.85,58.42 0 top
U1  AT32UC3A0512  [LQFP144]  135.89,58.42 180 top
U2  FT232RL  [SSOP28]  123.19,88.9 90 top
U3  MT48LC16M16A2  [TSOP54]  158.75,58.42 270 bottom
U4  TPS2020  [SO08]  111.76,91.44 90 top
U6  LM2678  [TO263-7]  148.59,90.17 0 top
U7  ADP3339  [SOT223]  136.53,86.04 180 top
U8  ADP3339  [SOT223]  99.06,77.47 90 top
U9  MT48LC32M16A2tg-75  [TSOP54]  104.14,22.86 0 top
U$1  PANASONIC-EVQ  [PANASONIC-EVQ]  132.08,5.08 270 top
U$6  SDMMC06132  [06132]  150.02,25.08 0 top
U$8  FDS9431A  [SO08]  103.5,66.67 0 top
U$9  PANASONIC-EVQ  [PANASONIC-EVQ]  108.58,5.08 270 top
VDDOUT  TPS-SMD-15RN  [SMD-15RN]  135.89,60.33 180 bottom
Y1  12mhz  [HC49UP]  135.89,39.37 0 top
Y2  ECS-3963-27mhz  [ASFL1]  81.92,65.41 0 top
Y3  ECS-3963-12.288mhz  [ASFL1]  73.66,39.37 0 top

## Library data of the parts
3V3 3V3C 5V GND VDDOUT = testpoint
C1-C54 C73-C115 C142-C146 C179-C186 R1-R20 R22-R27 R32 R37 R42 R47-R50 R63-R66 R70-R77 R82-R97 R130-R132 R161 = rc-master-smd
D1 D2 D7 D8 = diode
DSP1 J8-J10 U3 U4 U6-U9 U$1 U$6 U$8 U$9 = monome-inc
IC1 = analog-devices; MF: ALTERA CORPORATION; MPN: AD1836AASZ; OC_FARNELL: 8396558; OC_NEWARK: 59K3418
IC2 IC3 = analog-devices; MF: ALTERA CORPORATION; MPN: AD8607ARMZ-REEL; OC_FARNELL: 1464990; OC_NEWARK: 59K6925
J1 J2 = con-cuistack
J3 J11-J14 = Audio Jacks 0.25 inch
J4 P1 P3 = con-headers-jp
JP1 U1 = atmel-avr32
JP2 JP5 = pinhead
JP6 JP7 = jumper
JP8 = jumpers
L1 = inductor-coilcraft
L2 = inductor-bourns
LED2 = led
U2 = ftdi-chip
Y1-Y3 = crystal

## Nets
+3V3: 3V3.TP C34.1 C35.1 C36.1 C37.1 C38.1 C39.1 C41.1 J10._1 JP1.4 LED2.A P1.25 R1.2 R3.2 R9.2 R10.2 R11.2 R12.2 R13.2 R14.2 R18.1 R65.1 R66.1 U2.4 U3.1 U3.3 U3.9 U3.14 U3.27 U3.43 U3.49 U$6.4
+3V3C: 3V3C.TP C42.2 C142.1 C179.2 C180.2 C181.2 C182.2 C183.2 C184.2 IC1.46 R8.2 R32.2 R42.1 R47.1 R48.2 R71.1 R72.2 R73.2 R75.2 R77.2 U9.1 U9.3 U9.9 U9.14 U9.27 U9.43 U9.49 Y2.4 Y3.4
+5V: 5V.TP C2.2 C3.+ C46.1 C47.2 C48.+ C53.2 C54.+ C143.1 C144.1 IC1.1 IC1.40 L1.2 P1.26 R19.2 R20.2 R161.2 U2.20 U4.2 U4.3 U6.6 U7.3 U8.3
+5VA: C98.1 C103.2 C145.1 C146.1 IC1.10 IC1.15 IC2.8 IC3.8 R161.1
A-A2: U1.114 U3.23
A-A3: U1.112 U3.24
A-A4: U1.110 U3.25
A-A5: U1.107 U3.26
A-A6: U1.105 U3.29
A-A7: U1.103 U3.30
A-A8: U1.101 U3.31
A-A9: U1.99 U3.32
A-A10: U1.97 U3.33
A-A11: U1.95 U3.34
A-A13: U1.89 U3.35
A-A14: U1.87 U3.36
A-A16: U1.65 U3.20
A-A17: U1.63 U3.21
A-D0: U1.38 U3.2
A-D1: U1.35 U3.4
A-D2: U1.33 U3.5
A-D3: U1.31 U3.7
A-D4: U1.26 U3.8
A-D5: U1.24 U3.10
A-D6: U1.12 U3.11
A-D7: U1.10 U3.13
A-D8: U1.4 U3.42
A-D9: U1.2 U3.44
A-D10: U1.1 U3.45
A-D11: U1.144 U3.47
A-D12: U1.142 U3.48
A-D13: U1.140 U3.50
A-D14: U1.137 U3.51
A-D15: U1.135 U3.53
A-RESET: C1.1 JP1.6 R1.1 U1.23 U$1.2
A-SDA10: U1.136 U3.22
A-TCK: JP1.1 U1.129
A-TDI: JP1.9 U1.131
A-TDO: JP1.3 U1.130
A-TMS: JP1.5 U1.128
ABE0_: DSP1.P$151 U9.15
ABE1_: DSP1.P$150 U9.39
AD1836_RESET: DSP1.P$50 IC1.3 R47.2
AGND: C98.2 C99.1 C100.- C101.1 C102.- C103.1 C104.1 C105.2 C107.1 C108.1 C110.1 C111.2 C113.1 C114.1 C145.2 C146.2 IC1.11 IC1.14 IC1.28 IC1.29 IC2.4 IC3.4 J11.RN J11.TN J12.RN J12.TN R89.2 R97.2
AREF: IC2.1 IC2.2 IC2.5 R84.2 R92.2
B-A1: DSP1.P$149 U9.23
B-A2: DSP1.P$148 U9.24
B-A3: DSP1.P$147 U9.25
B-A4: DSP1.P$146 U9.26
B-A5: DSP1.P$142 U9.29
B-A6: DSP1.P$141 U9.30
B-A7: DSP1.P$140 U9.31
B-A8: DSP1.P$139 U9.32
B-A9: DSP1.P$138 U9.33
B-A10: DSP1.P$137 U9.34
B-A12: DSP1.P$135 U9.35
B-A13: DSP1.P$127 U9.36
B-A18: DSP1.P$122 U9.20
B-A19: DSP1.P$121 U9.21
B-D0: DSP1.P$116 U9.2
B-D1: DSP1.P$115 U9.4
B-D2: DSP1.P$114 U9.5
B-D3: DSP1.P$113 U9.7
B-D4: DSP1.P$112 U9.8
B-D5: DSP1.P$110 U9.10
B-D6: DSP1.P$109 U9.11
B-D7: DSP1.P$108 U9.13
B-D8: DSP1.P$105 U9.42
B-D9: DSP1.P$104 U9.44
B-D10: DSP1.P$103 U9.45
B-D11: DSP1.P$102 U9.47
B-D12: DSP1.P$101 U9.48
B-D13: DSP1.P$100 U9.50
B-D14: DSP1.P$99 U9.51
B-D15: DSP1.P$98 U9.53
B-HWAIT: DSP1.P$49 U1.39
B-MISO: DSP1.P$54 IC1.49 R131.2 U1.53
B-MOSI: DSP1.P$55 IC1.2 R130.2 U1.50
B-RESET: C95.1 DSP1.P$13 R32.1 U1.41 U$9.2
B-SCK: DSP1.P$53 IC1.51 R132.2 U1.54
B-SPISEL4: DSP1.P$47 IC1.50 R77.1
B-SPISS: DSP1.P$51 R8.1 U1.48
CAS: U1.126 U3.17
CLKIN: DSP1.P$10 R74.1
CLKOUT: DSP1.P$169 R37.2
CS1: U1.46 U3.19
DM: J8.2 R4.2
DP: J8.3 R5.2
DQM0: U1.120 U3.15
DQM1: U1.40 U3.39
DR0PRI: DSP1.P$74 IC1.47
DR0SEC: DSP1.P$73 IC1.48
DT0PRI: DSP1.P$68 IC1.38
DT0SEC: DSP1.P$67 IC1.41
EMU_: DSP1.P$83 R49.1
ENC0A: P1.7 U1.98
ENC0B: P1.8 U1.96
ENC1A: P1.5 U1.102
ENC1B: P1.6 U1.100
ENC2A: P1.3 U1.106
ENC2B: P1.4 U1.104
ENC3A: P1.1 U1.113
ENC3B: P1.2 U1.111
FILTR: C101.2 C102.+ IC1.13 IC2.3
FTDI-CTS: U1.34 U2.3
FTDI-RTS: U1.32 U2.11
FTDI-RX: U1.25 U2.1
FTDI-TX: U1.27 U2.5
GND: C1.2 C2.1 C3.- C4.2 C5.2 C6.2 C7.2 C8.2 C9.2 C10.2 C11.2 C12.2 C13.2 C14.2 C15.2 C16.2 C17.2 C18.2 C19.2 C20.2 C21.2 C22.2 C23.2 C24.2 C25.2 C26.2 C27.2 C28.2 C29.2 C30.2 C31.2 C32.2 C33.2 C34.2 C35.2 C36.2 C37.2 C38.2 C39.2 C40.2 C41.2 C42.1 C43.1 C44.1 C46.2 C47.1 C48.- C49.- C50.1 C51.- C52.1 C53.1 C54.- C73.- C74.1 C75.- C76.1 C77.1 C78.1 C79.1 C80.1 C81.1 C82.1 C83.1 C84.1 C85.1 C86.1 C87.1 C88.1 C89.1 C90.1 C91.1 C92.1 C93.1 C94.1 C95.2 C142.2 C143.2 C144.2 C179.1 C180.1 C181.1 C182.1 C183.1 C184.1 C185.- C186.1 D2.A D7.1 DSP1.P$1 DSP1.P$2 DSP1.P$3 DSP1.P$7 DSP1.P$8 DSP1.P$9 DSP1.P$15 DSP1.P$19 DSP1.P$30 DSP1.P$39 DSP1.P$40 DSP1.P$41 DSP1.P$42 DSP1.P$43 DSP1.P$44 DSP1.P$56 DSP1.P$70 DSP1.P$88 DSP1.P$89 DSP1.P$90 DSP1.P$91 DSP1.P$92 DSP1.P$97 DSP1.P$106 DSP1.P$117 DSP1.P$128 DSP1.P$129 DSP1.P$130 DSP1.P$131 DSP1.P$132 DSP1.P$133 DSP1.P$144 DSP1.P$155 DSP1.P$170 DSP1.P$174 DSP1.P$175 DSP1.P$176 GND.TP IC1.39 IC1.52 J1.1 J2.2 J8.4 J8.G1 J8.G2 J8.G3 J8.G4 J9.GND J10.1 J10._2 JP1.2 JP1.10 JP5.1 JP6.1 JP7.1 JP8.1 JP8.4 JP8.7 JP8.9 JP8.11 JP8.13 P1.27 P1.28 R2.2 R22.2 R23.1 R27.2 R64.2 R70.2 R130.1 R131.1 R132.1 U1.8 U1.18 U1.28 U1.37 U1.52 U1.72 U1.82 U1.83 U1.85 U1.86 U1.94 U1.109 U1.117 U1.132 U1.133 U2.7 U2.18 U2.21 U2.25 U3.6 U3.12 U3.28 U3.41 U3.46 U3.52 U3.54 U4.1 U6.4 U6.8 U7.1 U8.1 U9.6 U9.12 U9.28 U9.41 U9.46 U9.52 U9.54 U$1.1 U$6.3 U$6.6 U$6.GP U$9.1 Y2.2 Y3.2
IN1L+: IC1.16
IN1L-: IC1.17
IN1R+: IC1.18
IN1R-: IC1.19
IN2L+: IC1.20
IN2L-: IC1.21
IN2R+: IC1.27
IN2R-: IC1.26
KEY0: P1.12 U1.77
KEY1: P1.11 U1.78
KEY2: P1.10 U1.79
KEY3: P1.9 U1.80
MMC-DETECT: R13.1 U1.88 U$6.CD
MMC-PROTECT: R14.1 U1.90 U$6.WP
MODE-KEY: P1.13 U1.76
MODE-LED: P1.14 U1.75
N$1: C43.2 C44.2 D1.C R63.2 U6.2
N$3: D1.A J2.1
N$4: C32.1 U1.124 Y1.2
N$5: C33.1 U1.125 Y1.1
N$6: R15.1 R22.1 U2.19
N$7: C45.1 D2.C L1.1 U6.1
N$9: C45.2 U6.3
N$12: J9.DM U2.16
N$13: J9.DP U2.15
N$14: C52.2 U2.17
N$15: LED2.C R23.2
N$16: C73.+ R25.2 R26.2 R42.2 U8.2 U8.4
N$17: J9.VCC R15.2
N$18: C74.2 C185.+ C186.2 R26.1 U$8.1 U$8.2 U$8.3
N$19: D7.3 L2.1 U$8.5 U$8.6 U$8.7 U$8.8
N$22: C75.+ L2.2 R24.2
N$24: R37.1 U9.38
N$25: C96.1 R48.1 Y2.1
N$26: JP8.2 R49.2
N$28: JP8.5 R71.2
N$29: DSP1.P$95 JP6.2 R72.1
N$31: JP8.14 R50.2
N$32: C49.+ R16.2 R17.2 R18.2 U7.2 U7.4
N$35: DSP1.P$96 JP7.2 R73.1
N$36: C97.1 R75.1 Y3.1
N$38: C96.2 R74.2 Y2.3
N$44: R4.1 U1.70
N$45: R5.1 U1.71
N$55: J10.2 R63.1 R64.1
N$56: D8.C J10.0 U6.7
N$57: C97.2 R76.2 Y3.3
N$59: IC1.45 R76.1
N$62: C99.2 C100.+ IC1.12
N$64: IC2.6 IC2.7
N$68: C104.2 R82.1 R85.2 R86.2
N$69: C105.1 R83.1 R84.1 R88.1
N$70: C107.2 IC3.2 R88.2
N$71: C106.2 IC3.1 R86.1 R87.1
N$72: C108.2 C109.+ R87.2
N$73: C110.2 R90.1 R93.2 R94.2
N$74: C106.1 IC3.3 R85.1
N$75: C111.1 R91.1 R92.1 R96.1
N$76: C113.2 IC3.6 R96.2
N$77: C112.2 IC3.7 R94.1 R95.1
N$78: C114.2 C115.+ R95.2
N$79: C112.1 IC3.5 R93.1
N$128: JP2.1 U1.22
OLED-DC: P1.15 U1.47
OLED-RES: P1.16 U1.43
OUT1L: C115.- J11.S R97.1
OUT1L+: IC1.8 R91.2
OUT1L-: IC1.9 R90.2
OUT1R: C109.- J12.S R89.1
OUT1R+: IC1.31 R83.2
OUT1R-: IC1.30 R82.2
OUT2L+: IC1.6
OUT2L-: IC1.7
OUT2R+: IC1.33
OUT2R-: IC1.32
OUT3L+: IC1.4
OUT3L-: IC1.5
OUT3R+: IC1.35
OUT3R-: IC1.34
POWER_CON: D8.A U1.44
POWER_SW: J10._0 U1.42
RAS: U1.121 U3.18
RFS0: DSP1.P$75 IC1.44
RSCLK0: DSP1.P$76 IC1.43
SA10: DSP1.P$164 U9.22
SCAS_: DSP1.P$166 U9.17
SCKE: DSP1.P$173 U9.37
SCL: J1.3 R66.2 U1.123
SDA: J1.2 R65.2 U1.122
SDCK: R3.1 U1.115 U3.38
SDCKE: R2.1 U1.119 U3.37
SDWE: U1.127 U3.16
SMS_: DSP1.P$172 U9.19
SPI0-CS1: R9.1 U$6.1
SPI1-CS0: P1.17 U1.56
SPI1-CS1: P1.18 U1.62
SPI1-CS2: U1.64
SPI1-MISO: P1.20 R11.1 U1.60 U$6.7
SPI1-MOSI: P1.21 R10.1 U1.58 U$6.2
SPI1-SCK: P1.19 R12.1 U1.57 U$6.5
SRAS_: DSP1.P$167 U9.18
SWE_: DSP1.P$165 U9.16
TCK: DSP1.P$94 JP8.8
TDI: DSP1.P$86 JP8.12
TDO: DSP1.P$87 R50.1
TFS0: DSP1.P$69 IC1.36
TMS: DSP1.P$85 JP8.6
TRST_: DSP1.P$84 JP8.10 R70.1
TSCLK0: DSP1.P$72 IC1.37
USB-OC: R19.1 U1.73 U4.5
USB-VBOF: R20.1 U1.74 U4.4
VBUS: C50.2 C51.+ J8.1 U1.68 U4.6 U4.7 U4.8
VDDCORE: C23.1 C24.1 C25.1 C26.1 C27.1 C28.1 C29.1 C30.1 C31.1 C40.1 R6.2 U1.29 U1.51 U1.55 U1.138
VDDEXT: C76.2 C77.2 C78.2 C79.2 C80.2 C81.2 C82.2 C83.2 C84.2 C85.2 C86.2 C87.2 C88.2 DSP1.P$6 DSP1.P$12 DSP1.P$20 DSP1.P$31 DSP1.P$45 DSP1.P$57 DSP1.P$71 DSP1.P$93 DSP1.P$107 DSP1.P$118 DSP1.P$134 DSP1.P$145 DSP1.P$156 DSP1.P$171 R25.1 R27.1
VDDIN: C15.1 C16.1 C17.1 R17.1 U1.17
VDDINT: C89.2 C90.2 C91.2 C92.2 C93.2 C94.2 DSP1.P$25 DSP1.P$52 DSP1.P$66 DSP1.P$80 DSP1.P$111 DSP1.P$143 DSP1.P$157 DSP1.P$168 R24.1
VDDIO: C4.1 C5.1 C6.1 C7.1 C8.1 C9.1 C10.1 C11.1 C12.1 C13.1 C14.1 R16.1 U1.7 U1.36 U1.69 U1.81 U1.92 U1.93 U1.108 U1.116
VDDOUT: C18.1 C19.1 R6.1 R7.1 U1.16 VDDOUT.TP
VDDSYS: C20.1 C21.1 C22.1 R7.2 U1.84
VROUT: DSP1.P$4 DSP1.P$5 U$8.4